# Altium PCB Arduino-DUE-V03.PcbDoc (part 1 of 2)
Units mil, origin at the board's own origin, x right, y up, seen from the top; angles counter-clockwise.
Board outline 4000 x 2100 mil, 2 copper layers (Top, Bottom), stack 65.748 mil thick; 128 components, 163 nets, 632 pads, 387 vias.
Unrouted connection lines stored in the file: 4.
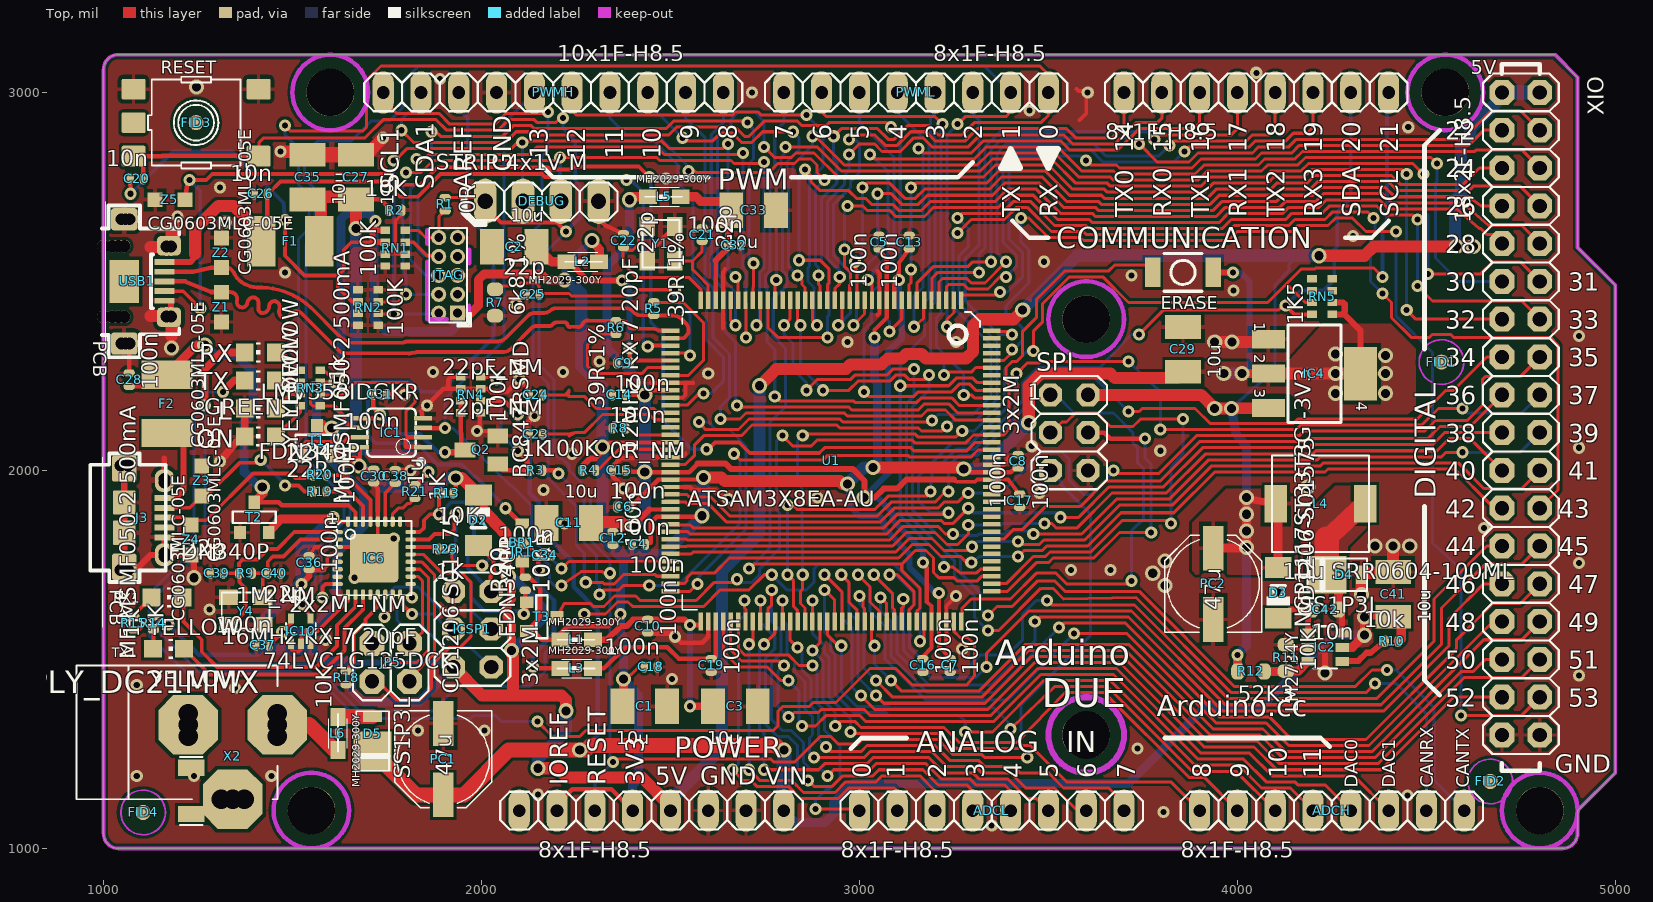
[diagram p0: Top view]
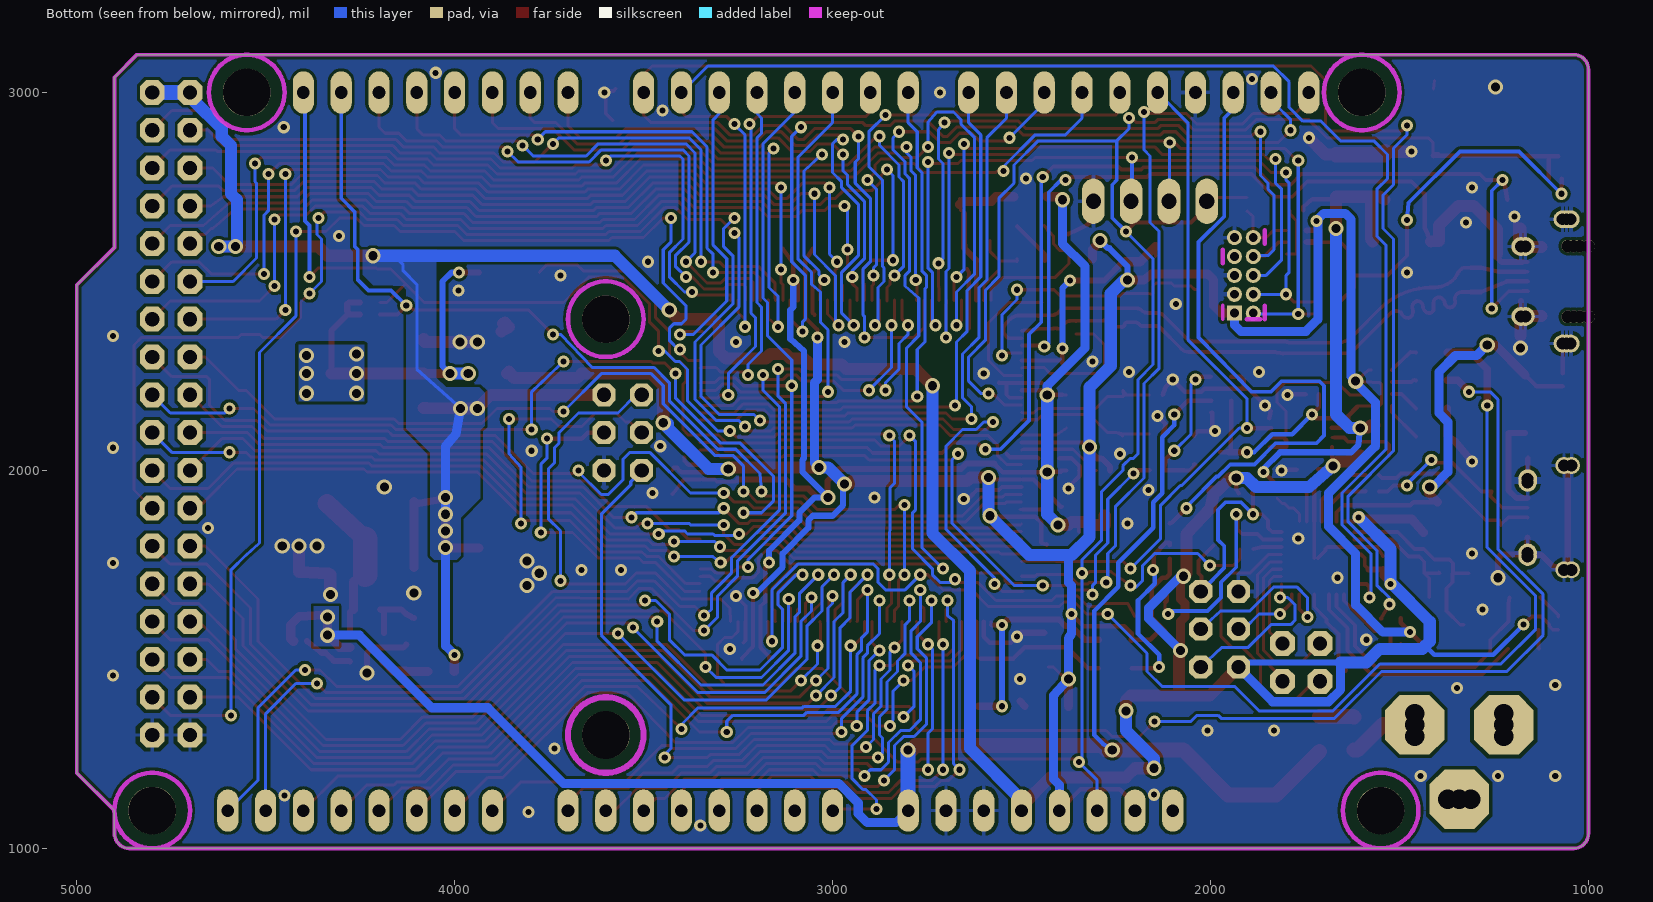
[diagram p1: Bottom view, seen from below]

## Layer stack, top to bottom
Top Solder: solder mask 0.4, Solder Resist, Dk 3.5
Top: signal copper 1.378
Dielectric 1: core 62.9921, FR-4, Dk 4.8
Bottom: signal copper 1.378
Bottom Solder: solder mask 0.4, Solder Resist, Dk 3.5

## Board outline
1039.37,3100 4840,3100 4900,3040 4900,2590 5000,2490 5000,1200 4900,1100 4900,1039.37 cw(c4860.63,1039.37) 4860.63,1000 1039.37,1000 cw(c1039.37,1039.37) 1000,1039.37 1000,3060.63 cw(c1039.37,3060.63)

## Design rules (kind name [scope] priority, off if disabled: settings)
Clearance [All] p1: gap=8 except(0: SMDPad-SMDPad SMDPad-THPad SMDPad-Via)
Clearance "Clearance (Same Net)" [All] p2: gap=0 except(6: SMDPad-SMDPad SMDPad-THPad SMDPad-Via)
HoleSize HoleSize_1 [All] p1: absolutevalues=TRUE maxlimit=100000 minlimit=16 maxpercent=80.000 minpercent=20.000
HoleSize [All] p2: absolutevalues=TRUE maxlimit=100 minlimit=1 maxpercent=80.000 minpercent=20.000
HoleToHoleClearance mdViaViaSameLayer [All] p1: gap=8 allowstackedmicrovias=TRUE
HoleToHoleClearance [All] p2: gap=10 allowstackedmicrovias=TRUE
PasteMaskExpansion mlMinCreamFrame [All] p1: expansion=-25
PasteMaskExpansion [All] p2: expansion=0
PolygonConnect ThermalVias [IsVia] p1: connectstyle=Direct reliefconductorwidth=10 reliefentries=4 polygonreliefangle="90 Angle" airgapwidth=10
PolygonConnect [All] p2: connectstyle=Relief reliefconductorwidth=10 reliefentries=4 polygonreliefangle="90 Angle" airgapwidth=10
RoutingVias [All] p1: holewidth=28 width=50 viastyle="Through Hole" minholewidth=28 minwidth=50 maxholewidth=28 maxwidth=50
SilkToSilkClearance [All] p1 off: silktosilkclearance=10
SilkToSolderMaskClearance [IsPad] p1 off: minsilkscreentomaskgap=10 clearancetoexposedcopper=TRUE
SolderMaskExpansion mlMinStopFrame [All] p1: expansion=2
SolderMaskExpansion [All] p2: expansion=4
Width Width_1 [All] p1: maxlimit=100000 minlimit=8 preferedwidth=10
Width [All] p2: maxlimit=10 minlimit=10 preferedwidth=10
25 further rules are at their usual default settings.

## Components (designator, comment, footprint, x,y, rotation, side; value= is the part's Value field where it differs from the comment)
ADCH "8x1F-H8.5" 1X08 4250,1100 r0 top
ADCL "8x1F-H8.5" 1X08 3350,1100 r0 top
BR1 "NM" J0402 2108,1834 r270 top
C1 "10u" SMC_B 2432,1376 r0 top
C2 "10u" SMC_B 2087,2592 r180 top
C3 "10u" SMC_B 2672,1376 r0 top
C4 "100n" C0402 2416,1804 r0 top
C5 "100n" C0402 3052,2604 r270 top
C6 "100n" C0402 2376,1904 r0 top
C7 "100n" C0402 3240,1484 r90 top
C8 "100n" C0402 3420,2024 r270 top
C9 "100n" C0402 2376,2284 r0 top
C10 "100n" C0402 2440,1588 r90 top
C11 "10u" SMC_B 2231,1861 r180 top
C12 "100n" C0402 2348,1820 r90 top
C13 "100n" C0402 3132,2604 r270 top
C14 "100n" C0402 2364,2200 r0 top
C15 "100n" C0402 2364,2000 r0 top
C16 "100n" C0402 3168,1484 r90 top
C17 "100n" C0402 3424,1920 r90 top
C18 "100n" C0402 2448,1480 r180 top
C19 "100n" C0402 2608,1484 r90 top
C20 "10n" C0402 1088,2772 r180 top
C21 "22p" C0402 2584,2624 r90 top
C22 "22p" C0402 2376,2608 r90 top
C23 "22pF_NM" C0402 2144,2096 r180 top
C24 "22pF_NM" C0402 2144,2200 r180 top
C25 "22p" C0402 2136,2466 r180 top
C26 "10n" C0402 1416,2732 r180 top
C27 "10u" SMC_B 1668,2776 r90 top
C28 "100n" C0402 1068,2240 r90 top
C29 "10u" SMC_B 3856,2320 r90 top
C30 "100n" C0402 1715,1985 r90 top
C31 "100n" C0402 1731,2201 r180 top
C32 "100n" C0402 2668,2596 r180 top
C33 "10u" SMC_B 2720,2688 r0 top
C34 "100n" C0402 2168,1776 r180 top
C35 "10u" SMC_B 1540,2776 r90 top
C36 "100n" C0402 1544,1756 r90 top
C37 "100n" C0402 1420.82,1537.54 r180 top
C38 "1u" C0402 1772,1984 r90 top
C39 "22p" C0402 1300,1728 r180 top
C40 "22p" C0402 1452,1728 r0 top
C41 "10u" SMC_B 4412,1672 r90 top
C42 "10n" C0603-ROUND 4232,1632 r0 top
COMMUNICATION "8x1F-H8.5" 1X08 4050,3000 r0 top
D2 "CD1206-S01575" MINIMELF 1992,1868 r270 top
D3 "CD1206-S01575" MINIMELF 4108,1676 r90 top
D4 "SS1P3L" DO220AAL 4264,1724 r0 top
D5 "SS1P3L" DO220AAL 1712,1284 r90 top
DEBUG "STRIP 4x1V M" 1X04 2160,2712 r180 top
ERASE "" SMD_157SW 3856,2524 r180 top
F1 "MF-MSMF050-2 500mA" L1812 1494,2606 r180 top
F2 "MF-MSMF050-2 500mA" L1812 1168,2176 r270 top
FID1 "" FIDUCIA-MOUNT 4540,2286.63 r0 top
FID2 "" FIDUCIA-MOUNT 4669,1177 r0 top
FID3 "" FIDUCIA-MOUNT 1245,2920 r0 top
FID4 "" FIDUCIA-MOUNT 1105,1095 r0 top
IC1 "LMV358IDGKR" MSOP08 1762,2100 r90 top
IC2 "LM2734Y" SOT23-6 4232,1532 r270 top
IC4 "NCP1117ST33T3G -3V3" SOT223 4204,2256 r270 top
IC6 "" MLF32 1716,1768 r0 top
IC10 "74LVC1G125DCK" SC70-5 1522.17,1574.8 r0 top
ICSP1 "3x2M" 2X03 1975.94,1580 r90 top
J3 "" CON2_USB_MICRO_B_AT 1055,1875 r270 top
JP5 "2x2M - NM" 2X02 1760.06,1492 r180 top
JR1 "0R" R0402#1 2108,1784 r90 top
JTAG "" PINHEAD_2X05_127 1912,2516 r180 top
L "YELLOW" CHIP-LED0805 1415,2164 r90 top
L1 "MH2029-300Y" 0805 2252,1552 r0 top
L2 "MH2029-300Y" 0805 2268,2552 r180 top
L3 "MH2029-300Y" 0805 2252,1476 r0 top
L4 "10u SRR0604-100ML" SRR0604 4220,1912 r0 top
L5 "MH2029-300Y" 0805 2484,2724 r0 top
L6 "MH2029-300Y" 0805 1620,1304 r270 top
ON "GREEN" CHIP-LED0805 1415,2090 r90 top
PC1 "47u" PANASONIC_D 1899,1236 r270 top
PC2 "47u" PANASONIC_D 3936,1700 r90 top
POWER "8x1F-H8.5" 1X08 2450,1100 r0 top
PWMH "10x1F-H8.5" 1X10 2190,3000 r180 top
PWML "8x1F-H8.5" 1X08 3150,3000 r180 top
Q2 "BC847BSMD" SOT23 2000,2054 r90 top
R1 "0R" R0402#1 1904,2704 r90 top
R2 "10K" R0402#1 1772,2688 r180 top
R3 "1K" R0402#1 2144,2000 r180 top
R4 "100K" R0402#1 2284,2000 r180 top
R5 "39R 1%" R0402#1 2456,2428 r90 top
R6 "39R 1%" R0402#1 2356,2378 r270 top
R7 "6k8 1%" R0603-ROUND 2036,2444 r90 top
R8 "0R_NM" R0402#1 2364,2112 r0 top
R9 "1M_NM" R0402#1 1376,1728 r0 top
R10 "10k" R0402#1 4408,1548 r180 top
R11 "10K" R0603-ROUND 4128,1504 r90 top
R12 "52K3" R0603-ROUND 4036,1468 r0 top
R13 "10K" R0402#1 1908,1940 r0 top
R14 "1K" R0402#1 1132,1596 r270 top
R15 "1K" R0402#1 1080,1596 r90 top
R18 "10K" R0402#1 1642.11,1451.06 r270 top
R19 "22R" R0402#1 1572,1944 r180 top
R20 "22R" R0402#1 1572,1988 r180 top
R21 "1K" R0402#1 1824,1944 r90 top
R23 "1K" R0402#1 1904,1792 r0 top
R99 "10K" R0402#2 2116,1700 r90 top
RESET "TS42" TS42 1245,2920 r0 top
RN1 "100K" CAT16 1772,2588 r90 top
RN2 "100K" CAT16 1700,2431 r270 top
RN3 "1k" CAY16 1547,2218 r270 top
RN4 "100K" CAT16 1972,2200 r270 top
RN5 "1K5" CAT16 4224,2460 r90 top
RX "YELLOW" CHIP-LED0805 1415,2312 r90 top
RX1 "YELLOW" CHIP-LED0805 1168,1664 r270 top
SPI "3x2M" 2X03 3555,2100 r270 top
T1 "FDN340P" SOT-23 1566,2079 r180 top
T2 "FDN340P" SOT-23 1400,1876 r180 top
T3 "FDN340P" SOT-23 2160,1612 r90 top
TX "YELLOW" CHIP-LED0805 1415,2238 r90 top
TX1 "YELLOW" CHIP-LED0805 1172,1528 r270 top
U1 "ATSAM3X8EA-AU" LQFP144 2925,2025 r180 top
USB1 "" MCR-AB1-S-RA-SMT 1055,2500 r270 top
X2 "POWERSUPPLY_DC21MMX" POWERSUPPLY_DC-21MM 1210,1330 r90 top
XIO "18x2F-H8.5" 2X18 4750,2150 r270 top
Y1 "12MHz KX-7 20pF" CRYSTAL-3.2-2.5 2475,2600 r270 top
Y4 "16MHz KX-7 20pF" CRYSTAL-3.2-2.5 1376,1628 r0 top
Z1 "CG0603MLC-05E" CT/CN0603 1312,2432 r270 top
Z2 "CG0603MLC-05E" CT/CN0603 1312,2576 r90 top
Z3 "CG0603MLC-05E" CT/CN0603 1260,1972 r270 top
Z4 "CG0603MLC-05E" CT/CN0603 1232,1816 r90 top
Z5 "CG0603MLC-05E" CT/CN0603 1176,2716 r0 top

## Footprints (in the part's own frame and the unit in brackets; to place one, negate y for a bottom-side part, rotate by r counter-clockwise, add the part's x,y. Pads: shape width x height; smd on the part's side, far side on the other; paste and mask are expansions set on the pad)
1X04 [mil] "1X04"
  oval 60x120 hole 40: 1(-150,0) 2(-50,0) 3(50,0) 4(150,0)
  silkscreen extent -200,-50 200,50
1X08 [mil] "1X08"
  oval 56x112 hole 33.46: 1(-350,0) 2(-250,0) 3(-150,0) 4(-50,0) 5(50,0) 6(150,0) 7(250,0) 8(350,0)
  silkscreen extent -400,-50 400,50
1X10 [mil] "1X10"
  oval 56x112 hole 33.46: 1(-450,0) 2(-350,0) 3(-250,0) 4(-150,0) 5(-50,0) 6(50,0) 7(150,0) 8(250,0) 9(350,0) 10(450,0)
  silkscreen extent -500,-50 500,50
2X02 [mil] "2X02"
  oct 66x66 hole 37.4: 1(-50,-50) 2(-50,50) 3(50,-50) 4(50,50)
  silkscreen extent -100,-100 100,100
2X03 [mil] "2X03"
  oct 61.02x61.02 hole 37.4: 1(-100,-50) 2(-100,50) 3(0,-50) 4(0,50) 5(100,-50) 6(100,50)
  silkscreen extent -150,-100 150,100
2X18 [mil] "2X18"
  oct 66x66 hole 37.4: 1(-850,-50) 2(-850,50) 3(-750,-50) 4(-750,50) 5(-650,-50) 6(-650,50) 7(-550,-50) 8(-550,50) 9(-450,-50) 10(-450,50) 11(-350,-50) 12(-350,50) 13(-250,-50) 14(-250,50) 15(-150,-50) 16(-150,50) 17(-50,-50) 18(-50,50) 19(50,-50) 20(50,50) 21(150,-50) 22(150,50) 23(250,-50) 24(250,50) 25(350,-50) 26(350,50) 27(450,-50) 28(450,50) 29(550,-50) 30(550,50) 31(650,-50) 32(650,50) 33(750,-50) 34(750,50) 35(850,-50) 36(850,50)
  silkscreen extent -900,-100 900,100
0805 [mm] "0805"
  rect 1.2x1 smd: 1(-1.1,0) 2(1.1,0)
  silkscreen extent -1.3,-0.63 1.2,0.63
C0402 [mil] "C0402"
  rrect90% 20x30 smd: 1(-17.5,0) 2(17.5,0)
C0603-ROUND [mil] "C0603-ROUND"
  rrect80% 35.37x43.31 smd: 1(-35,0) 2(35,0)
CAT16 [mm] "CAT16"
  rect 0.5x0.65 smd: 1(-1.2,-0.675) 2(-0.4,-0.675) 3(0.4,-0.675) 4(1.2,-0.675) 5(1.2,0.675) 6(0.4,0.675) 7(-0.4,0.675) 8(-1.2,0.675)
CAY16 [mm] "CAY16"
  rect 0.5x0.65 smd: 1(-1.2,-0.675) 2(-0.4,-0.675) 3(0.4,-0.675) 4(1.2,-0.675) 5(1.2,0.675) 6(0.4,0.675) 7(-0.4,0.675) 8(-1.2,0.675)
CHIP-LED0805 [mil] "CHIP-LED0805"
  rect 47.24x47.24 smd: A(0,-41.34) C(0,41.34)
  silkscreen extent -27,0 27,12
CON2_USB_MICRO_B_AT [mil] "CON2_USB_MICRO_B_AT"
  rrect10% 16x53 smd: P1(-52,106) P2(-26,106) P3(0,106) P4(26,106) P5(52,106)
  round 50 hole 31.5: P$1(-103,106)
  round 49 hole 31.5: P$2(-93,106) P$7(93,106) P$8(103,106)
  round 45 hole 31.5: P$3(-138,-10) P$4(-138,10) P$5(138,10) P$6(138,-10)
  rrect20% 70x65 smd: S1(-130,0) S2(130,0)
  rrect80% 60x50 smd: S3(-98,106) S4(98,106)
  rrect10% 64x60 smd: S5(-40,0) S6(40,0)
  silkscreen extent -170,-90 290,110
CRYSTAL-3.2-2.5 [mil] "CRYSTAL-3.2-2.5"
  rect 51.18x41.34 smd: 1(-45.28,-36.42) 2(45.28,-36.42) 3(45.28,36.42) 4(-45.28,36.42)
  silkscreen extent -63,-49 63,49
CT/CN0603 [mm] "CT/CN0603"
  rect 1x1 smd: 1(-1,0) 2(1,0)
DO220AAL [mil] "DO220AAL"
  rect 105x100 smd: P$1(-27.56,0)
  rect 30x50 smd: P$2(64.96,0)
  silkscreen extent -79,-43 79,43
FIDUCIA-MOUNT [mil] "FIDUCIA-MOUNT"
  rrect100% 40x40 smd: P$1(0,0)
  Top keep-out circle w5: c0,0 r59.06
J0402 [mm] "J0402"
  rect 0.7x0.9 smd: 1(-0.65,0) 2(0.65,0) 3(1.95,0)
L1812 [mil] "L1812"
  rect 74.8x133.86 smd: 1(-76.77,0) 2(76.77,0)
LQFP144 [mil] "LQFP144"
  rect 11.81x47.24 smd: 1(-344.49,-425.2) 2(-324.8,-425.2) 3(-305.12,-425.2) 4(-285.43,-425.2) 5(-265.75,-425.2) 6(-246.06,-425.2) 7(-226.38,-425.2) 8(-206.69,-425.2) 9(-187.01,-425.2) 10(-167.32,-425.2) 11(-147.64,-425.2) 12(-127.95,-425.2) 13(-108.27,-425.2) 14(-88.58,-425.2) 15(-68.9,-425.2) 16(-49.21,-425.2) 17(-29.53,-425.2) 18(-9.84,-425.2) 19(9.84,-425.2) 20(29.53,-425.2) 21(49.21,-425.2) 22(68.9,-425.2) 23(88.58,-425.2) 24(108.27,-425.2) 25(127.95,-425.2) 26(147.64,-425.2) 27(167.32,-425.2) 28(187.01,-425.2) 29(206.69,-425.2) 30(226.38,-425.2) 31(246.06,-425.2) 32(265.75,-425.2) 33(285.43,-425.2) 34(305.12,-425.2) 35(324.8,-425.2) 36(344.49,-425.2) 73(344.49,425.2) 74(324.8,425.2) 75(305.12,425.2) 76(285.43,425.2) 77(265.75,425.2) 78(246.06,425.2) 79(226.38,425.2) 80(206.69,425.2) 81(187.01,425.2) 82(167.32,425.2) 83(147.64,425.2) 84(127.95,425.2) 85(108.27,425.2) 86(88.58,425.2) 87(68.9,425.2) 88(49.21,425.2) 89(29.53,425.2) 90(9.84,425.2) 91(-9.84,425.2) 92(-29.53,425.2) 93(-49.21,425.2) 94(-68.9,425.2) 95(-88.58,425.2) 96(-108.27,425.2) 97(-127.95,425.2) 98(-147.64,425.2) 99(-167.32,425.2) 100(-187.01,425.2) 101(-206.69,425.2) 102(-226.38,425.2) 103(-246.06,425.2) 104(-265.75,425.2) 105(-285.43,425.2) 106(-305.12,425.2) 107(-324.8,425.2) 108(-344.49,425.2)
  rect 47.24x11.81 smd: 37(425.2,-344.49) 38(425.2,-324.8) 39(425.2,-305.12) 40(425.2,-285.43) 41(425.2,-265.75) 42(425.2,-246.06) 43(425.2,-226.38) 44(425.2,-206.69) 45(425.2,-187.01) 46(425.2,-167.32) 47(425.2,-147.64) 48(425.2,-127.95) 49(425.2,-108.27) 50(425.2,-88.58) 51(425.2,-68.9) 52(425.2,-49.21) 53(425.2,-29.53) 54(425.2,-9.84) 55(425.2,9.84) 56(425.2,29.53) 57(425.2,49.21) 58(425.2,68.9) 59(425.2,88.58) 60(425.2,108.27) 61(425.2,127.95) 62(425.2,147.64) 63(425.2,167.32) 64(425.2,187.01) 65(425.2,206.69) 66(425.2,226.38) 67(425.2,246.06) 68(425.2,265.75) 69(425.2,285.43) 70(425.2,305.12) 71(425.2,324.8) 72(425.2,344.49) 109(-425.2,344.49) 110(-425.2,324.8) 111(-425.2,305.12) 112(-425.2,285.43) 113(-425.2,265.75) 114(-425.2,246.06) 115(-425.2,226.38) 116(-425.2,206.69) 117(-425.2,187.01) 118(-425.2,167.32) 119(-425.2,147.64) 120(-425.2,127.95) 121(-425.2,108.27) 122(-425.2,88.58) 123(-425.2,68.9) 124(-425.2,49.21) 125(-425.2,29.53) 126(-425.2,9.84) 127(-425.2,-9.84) 128(-425.2,-29.53) 129(-425.2,-49.21) 130(-425.2,-68.9) 131(-425.2,-88.58) 132(-425.2,-108.27) 133(-425.2,-127.95) 134(-425.2,-147.64) 135(-425.2,-167.32) 136(-425.2,-187.01) 137(-425.2,-206.69) 138(-425.2,-226.38) 139(-425.2,-246.06) 140(-425.2,-265.75) 141(-425.2,-285.43) 142(-425.2,-305.12) 143(-425.2,-324.8) 144(-425.2,-344.49)
  silkscreen extent -394,-394 394,394
MCR-AB1-S-RA-SMT [mm] "MCR-AB1-S-RA-SMT"
  round 0.85 hole 0.85: 1(-2.375,-0.8) 1(-2.375,-0.4) 1(-2.375,0) 1(-2.375,-1.4) 1(2.375,-0.8) 1(2.375,-0.4) 1(2.375,0) 1(2.375,-1.4)
  rrect10% 0.4x1.35 smd: 1(-1.3,2.7) 2(-0.65,2.7) 3(0,2.7) 4(0.65,2.7) 5(1.3,2.7)
  round 1.2 hole 0.8: P$1(-4.175,0.356) P$3(-4.175,0.076) P$4(-4.175,-0.203) P$5(4.175,0.356) P$6(4.175,0.076) P$7(4.175,-0.203)
  rect 2.9x2 smd: P$2(0,0)
  round 1.27 hole 0.8: P$8(-2.35,3.15) P$9(-2.35,2.85) P$10(2.35,3.15) P$11(2.35,2.85)
  rrect40% 1.3x1.6 smd: S1(-2.4,3) S2(2.4,3)
  rrect30% 1.5x1.8 smd: S3(-4.175,0) S4(4.175,0)
  silkscreen extent -5.35,-1.5 5.35,3.7
MINIMELF [mil] "MINIMELF"
  rect 55.12x70.87 smd: A(66.93,0) C(-66.93,0)
  silkscreen extent -34,-31 20,31
MLF32 [mil] "MLF32"
  rrect80% 27.56x11.02 smd: 1(-96.46,68.9) 2(-96.46,49.21) 3(-96.46,29.53) 4(-96.46,9.84) 5(-96.46,-9.84) 6(-96.46,-29.53) 7(-96.46,-49.21) 8(-96.46,-68.9) 17(96.46,-68.9) 18(96.46,-49.21) 19(96.46,-29.53) 20(96.46,-9.84) 21(96.46,9.84) 22(96.46,29.53) 23(96.46,49.21) 24(96.46,68.9)
  rrect80% 11.02x27.56 smd: 9(-68.9,-96.46) 10(-49.21,-96.46) 11(-29.53,-96.46) 12(-9.84,-96.46) 13(9.84,-96.46) 14(29.53,-96.46) 15(49.21,-96.46) 16(68.9,-96.46) 25(68.9,96.46) 26(49.21,96.46) 27(29.53,96.46) 28(9.84,96.46) 29(-9.84,96.46) 30(-29.53,96.46) 31(-49.21,96.46) 32(-68.9,96.46)
  rrect15% 128.11x128.11 smd: 33(0,0)
  silkscreen extent -98,-98 98,98
MSOP08 [mil] "MSOP08"
  rect 11.81x47.24 smd: 1(-38.43,-83.19) 2(-12.83,-83.19) 3(12.76,-83.19) 4(38.35,-83.19) 5(38.35,83.15) 6(12.76,83.15) 7(-12.83,83.15) 8(-38.43,83.15)
  silkscreen extent -64,-64 64,64
PANASONIC_D [mm] "PANASONIC_D"
  rect 3x1.4 smd: +(2.4,0) -(-2.4,0)
  silkscreen extent -3.25,-3.25 3.25,3.25
PINHEAD_2X05_127 [mil] "PINHEAD_2X05_127"
  rect 40x40 hole 23.62: 1(-25,100)
  round 40 hole 23.62: 2(25,100) 3(-25,50) 4(25,50) 5(-25,0) 6(25,0) 7(-25,-50) 8(25,-50) 9(-25,-100) 10(25,-100)
  silkscreen extent -60,-125 50,135
POWERSUPPLY_DC-21MM [mil] "POWERSUPPLY_DC-21MM"
  oct 157.48x157.48 hole 51.18: 1(-200,-132) 2(-3,-250) 3(-3,-14)
  round 76.77 hole 51.18: 4(-200,-162) 5(-200,-102) 6(-33,-14) 7(27,-14) 8(-33,-250) 9(27,-250)
  silkscreen extent -200,-250 154,281
R0402#1 [mil] "R0402"
  rrect90% 20x30 smd: 1(-17.5,0) 2(17.5,0)
R0402#2 [mil] "R0402"
  rrect90% 20x30 smd: 1(-17.5,0) 2(17.5,0)
  rect 43.31x70.87 smd: P$1(-609.02,884) P$2(-486.98,884)
  silkscreen extent -638,854 -458,914
R0603-ROUND [mil] "R0603-ROUND"
  rrect80% 35.37x43.31 smd: 1(-35,0) 2(35,0)
SC70-5 [mm] "SC70-5"
  rect 0.4x0.7 smd: 1(-0.65,-0.85) 2(0,-0.85) 3(0.65,-0.85) 4(0.65,0.85) 5(-0.65,0.85)
  silkscreen extent -1,-0.55 1,0.55
SMC_B [mil] "SMC_B"
  rect 62.99x94.49 smd: +(-59.06,0) -(59.06,0)
SMD_157SW [mil] "SMD_157SW"
  rect 40x78 smd: 1(-80,0) 2(80,0)
  silkscreen extent -50,-50 50,50
SOT23 [mm] "SOT23"
  rect 1x1.4 smd: 1(-0.95,-1.1) 2(0.95,-1.1) 3(0,1.1)
SOT23-6 [mil] "SOT23-6"
  rect 23.62x35.43 smd: 1(-37.4,-45.28) 2(0,-45.28) 3(37.4,-45.28) 4(37.4,45.28) 5(0,45.28) 6(-37.4,45.28)
  silkscreen extent -56,-31 56,31
SOT223 [mil] "SOT223"
  rect 48x88 smd: 1(-91,-122) 2(0,-122) 3(91,-122)
  rect 141.73x86.61 smd: 4(0,122.01)
  silkscreen extent -129,-70 129,70
SOT-23 [mil] "SOT-23"
  rect 31x35 smd: 1(1,-40) 2(-37,40) 3(39,40)
  silkscreen extent -56,-15 58,15
SRR0604 [mm] "SRR0604"
  rect 1.5x2.5 smd: P$1(3,0) P$2(-3,0)
  silkscreen extent -3.25,-3.25 3.25,3.25
TS42 [mil] "TS42"
  rrect15% 62.99x55.12 smd: 1(-165.35,88.58) 2(165.35,88.58) 3(-165.35,-88.58) 4(165.35,-88.58) 5(-165.35,0)
  silkscreen extent -127,-122 117,122

## Part data
ADCH ADCL COMMUNICATION POWER PWML: library part 1X08
BR1: library part J0402
C1 C2 C3 C11 C27 C29 C33 C35 C41: library part SMC_B
C4 C5 C6 C7 C8 C9 C10 C12 C13 C14 C15 C16 C17 C18 C19 C20 C21 C22 C23 C24 C25 C26 C28 C30 C31 C32 C34 C36 C37 C38 C39 C40: library part C0402
C42: library part C0603-ROUND
D2 D3: library part MINIMELF
D4 D5: library part DO220AAL
DEBUG: library part 1X04
ERASE: library part SMD_157SW
F1 F2: library part L1812
FID1 FID2 FID3 FID4: library part FIDUCIA-MOUNT
IC1: library part MSOP08
IC2: library part SOT23-6
IC4: library part SOT223
IC6: library part MLF32
IC10: library part SC70-5
ICSP1 SPI: library part 2X03
J3: library part CON2_USB_MICRO_B_AT
JP5: library part 2X02
JR1 R1 R2 R3 R4 R5 R6 R8 R9 R10 R13 R14 R15 R18 R19 R20 R21 R23 R99: library part R0402
JTAG: library part PINHEAD_2X05_127
L ON RX RX1 TX TX1: library part CHIP-LED0805
L1 L2 L3 L5 L6: library part 0805
L4: library part SRR0604
PC1 PC2: library part PANASONIC_D
PWMH: library part 1X10
Q2: library part SOT23
R7 R11 R12: library part R0603-ROUND
RN1 RN2 RN4 RN5: library part CAT16
RN3: library part CAY16
T1 T2 T3: library part SOT-23
U1: library part LQFP144
USB1: library part MCR-AB1-S-RA-SMT
X2: library part POWERSUPPLY_DC-21MM
XIO: library part 2X18
Y1 Y4: library part CRYSTAL-3.2-2.5
Z1 Z2 Z3 Z4 Z5: library part CT/CN0603

## Free pads (board coordinates)
  round 125.98 hole 125.98: 1(1550,1100) 1(1600,3000) 1(3600,1300) 1(3600,2400) 1(4550,3000) 1(4800,1100)

## Via types
v1: diameter 32/32 (per signal layer), hole 16, Top to Bottom, 323 vias
v2: diameter 40/40 (per signal layer), hole 24, Top to Bottom, 64 vias

## Nets (pads, with @x,y where several pads share a name; then routed paths per layer and width w, separated by ;. In a path a pad name is that pad's centre, name@x,y a point inside that pad or via, vN(x,y) a via of type N, cw(c..) or ccw(c..) an arc to the next point about the centre after c; other vN are vias at no path point)
5-GND: RESET.5
8PB4: IC6.18 JP5.1 | length 217.3
  Top w8: JP5.1@1810.06,1542 1844,1572 1844,1708 1833.21,1718.79 IC6.18@1812.46,1718.79
8PB5: IC6.19 JP5.3 | length 432.8
  Top w8: JP5.3@1710.06,1542 1760.06,1492 1828,1492 1860,1524 1860,1716 1837.53,1738.47 IC6.19@1812.46,1738.47
8PB6: IC6.20 JP5.2 | length 387
  Top w8: JP5.2@1810.06,1442 1810.06,1450.06 1876,1516 1876,1724 1841.84,1758.16 IC6.20@1812.46,1758.16
8PB7: IC6.21 JP5.4 | length 721.5
  Top w8: JP5.4@1710.06,1442 1726,1442 1776,1392 1836,1392 1868,1424 1868,1484 1916,1532 1944,1532 1972,1560 1972,1704.06 1948.06,1728 1896,1728 1846.16,1777.84 IC6.21@1812.46,1777.84
16U2-TX: IC6.9 IC10.1 IC10.2 | length 262.9
  Top w10: IC10.1@1496.58,1541.34 1496.58,1527.42 1504,1520 1516,1520 1522.17,1526.17 IC10.2@1522.17,1541.34 1523.75,1542.91 1523.75,1566.93 1531.62,1574.8 1566.93,1574.8 1647.1,1654.98 IC6.9@1647.1,1671.54
+3V3: BR1.3 C1.+ C4.2 C5.2 C6.2 C7.2 C8.2 C18.2 C20.2 C29.+ C37.1 ERASE.1 IC1.6 IC4.2 IC4.4 IC10.5 JR1.1 JTAG.1 L1.1 L2.1 POWER.2 POWER.4 R4.2 R99.2 RN1.5 RN1.6 RN2.2 RN2.3 RN3.5 RN3.7 RN3.8 RN5.1 RN5.2 T3.2 U1.11 U1.52 U1.57 U1.62 U1.105 U1.125 | length 11598.3
  Top w8: RN3.8@1573.57,2265.24 1582.76,2265.24 v2(1616,2236) 1613.75,2233.75 RN3.7@1573.57,2233.75 1571.83,2232 1552,2232 1548,2228 1548,2176 1553.24,2170.76 RN3.5@1573.57,2170.76 1610.76,2170.76 1612,2168 ; RN2.2@1672.68,2446 RN2.2@1673.43,2446.75 ; L2.1@2311.31,2552 2313.31,2553.31 L2.1@2312,2560 ; C1.+@2372.94,1376 C1.+@2376,1376 ; v2(2376,1448) 2396,1460 2416,1480 C18.2@2430.5,1480 ; U1.57@2496,1976 U1.57@2499.8,1975.79 U1.57@2503.5,1975.5 ; U1.11@3072.5,2452 U1.11@3072.64,2450.2 ; C8.2@3420,2006.5 C8.2@3424,2000
  Top w10: C37.1@1438.32,1537.54 C37.1@1438.32,1538.32 ; v1(1480,2662) 1480,2568 1532,2516 1620,2516 ; RN2.2@1672.68,2446 1672,2446 1672,2422 1670.84,2415.73 1670.75,2415.25 RN2.3@1673.43,2415.25 ; RN2.2@1673.43,2446.75 1657.25,2446.75 1620,2484 1620,2516 ; 1712,2603.75 1655.75,2603.75 1636,2584 1636,2532 1620,2516 ; RN5.2@4250.57,2444.25 4259.75,2444.25 RN5.2@4260,2444
  Top w11: v2@2327,2066 2339.21,2074.21 U1.52@2499.8,2074.21 ; 2467.5,1975.5 U1.57@2496,1976 ; U1.57@2503.5,1975.5 2579.5,1975.5 2580,1976 v2(2587.5,1981.5) ; v1(3040,2352) 3040,2372 3072.5,2404.5 3072.5,2449 3072.64,2448.64 U1.11@3072.64,2450.2 ; U1.11@3072.5,2452 3072.5,2555 ; v1(3210,1676) 3210.43,1678.43 U1.105@3210.43,1599.8 3210.43,1533.57 3240,1504 C7.2@3240,1501.5
  Top w12: C20.2@1070.5,2772 v1(1072,2732) ; C37.1@1438.32,1538.32 v1(1472,1572) 1496.58,1596.58 IC10.5@1496.58,1608.26 ; 1612,2168 1636,2144 1636,2132 1655.24,2112.76 IC1.6@1678.85,2112.76 ; JR1.1@2108,1766.5 BR1.3@2108,1757.23 2108,1725.5 R99.2@2116,1717.5 2117.5,1716 2128,1716 2156,1688 2156,1611 T3.2@2120,1575 2129,1583 2160,1552 L1.1@2208.69,1552 2208.69,1568.69 2228,1588 2336,1588 v1(2368,1620) ; POWER.2@2200,1100 2200,1116 2240,1156 2344,1156 POWER.4@2400,1100 ; C6.2@2393.5,1904 2396,1904 2467.5,1975.5 ; C4.2@2433.5,1804 2448,1808 2448,1862 2463.36,1877.36 U1.62@2499.8,1877.36 2581.36,1877.36 v2(2584,1880) ; C5.2@3052,2586.5 3072.5,2555 ; v2(3276,2004) 3284.53,1995.47 U1.125@3350.2,1995.47 3400.53,1995.47 3411.56,2006.5 C8.2@3420,2006.5
  Top w16: v1(1720,2660) 1712,2636 ; RN1.6@1745.43,2603.75 1712,2603.75 1712,2636 ; RN1.5@1745.43,2635.24 1721.43,2636 1712,2636 ; L1.1@2206.28,1554.41 L1.1@2208.69,1552 ; R4.2@2266.5,2000 2266.5,2010.5 2288,2032 2300,2032 2320,2052 v2(2320,2062) v2@2327,2066 ; ERASE.1@3936,2524 v1(3988,2524) ; RN5.1@4250.57,2412.76 4276.76,2412.76 ; RN5.2@4250.57,2444 RN5.2@4250.57,2444.25 ; RN5.2@4250.83,2444 4260,2444 4280,2444 4284,2440 4284,2420 4276.76,2412.76 ; IC4.4@4326.01,2256 4326.01,2369.99 4283.24,2412.76 4276.76,2412.76
  Top w24: JTAG.1@1937,2416 1972,2416 1992,2436 1992,2504 2008,2520 2156,2520 2176,2504 v2(2220,2504) ; v2(2292,2608) 2312,2584 L2.1@2312,2560 ; C1.+@2376,1376 v2(2376,1448) ; v2(4012,2256) IC4.2@4082,2256
  Top w32: v2(2587.5,1981.5) 2634.5,1981.5 2644,1972 2948,1972 2956,1964 v2(2968,1964) ; v2(3036,2008) 3272,2008 v2(3276,2004) ; v2(3448,2126) 3448,2224 3480,2256 3664,2256 3676,2244 3843.06,2244 C29.+@3856,2260.94 C29.+@3860.94,2256 ; IC4.2@4082,2256 v2(4260,2256) IC4.4@4326.01,2256
  Bottom w10: v1(1072,2732) 1184,2844 1340,2844 1476,2708 v1(1480,2662)
  Bottom w16: v2@1616,2232 v2(1616,2236) ; v1@1716,2656 v1(1720,2660) ; v2(2220,2504) 2220,2540 2268,2588 2272,2588 v2(2292,2608) ; v2(2584,1880) v2@2587.5,1884.5 ; v2(2968,1964) 2972,1960 2972,1908 3000,1880 3052,1880 3064,1868 3064,1848 3132,1780 3132,1744 3200,1676 v1(3210,1676) ; v1(3988,2524) 4008,2524 4032,2500 4032,2276 v2(4012,2256)
  Bottom w24: v1(1472,1572) 1544,1572 1616,1644 1616,1780 1688,1852 1688,1940 1564,2064 1564,2180 v2@1616,2232 ; v2(1616,2236) 1628,2248 1628,2664 1644,2680 1700,2680 v1(1720,2660) ; v1@1716,2656 1716,2400 1748,2368 1920,2368 1937,2385 JTAG.1@1937,2416 ; 2368,1776 2376,1768 2376,1704 2368,1696 v1(2368,1620) 2368,1568 2376,1556 v2(2376,1448) 2416,1404 2416,1184 2400,1168 POWER.4@2400,1100 ; v2(3036,2008) 3048,2020 3048,2232 3040,2240 v1(3040,2352)
  Bottom w32: v2(2220,2504) 2228,2504 2264,2468 2264,2276 2320,2220 v2(2320,2062) 2320,1824 2368,1776 2480,1776 v2(2584,1880) ; v2@2587.5,1884.5 v2(2587.5,1981.5) ; v2(2968,1964) 3012,2008 v2(3036,2008) ; v2(3276,2004) 3328,2004 3436,2112 3436,2124 v2(3448,2126) ; v2(3964,2256) v2(4012,2256)
  other v2: 4260,2204 4392,2204 4392,2256 4392,2304 4260,2308
+5V: C30.2 C36.1 D2.C D3.A IC1.8 IC4.3 IC6.4 IC6.32 ICSP1.2 L4.P$2 PC2.+ POWER.5 R12.1 R13.2 R14.1 R15.1 SPI.2 T1.2 T2.2 XIO.1 XIO.2 | length 10625.7
  Top w10: R15.1@1080,1578.5 1094.5,1578.5 1104,1588 1104,1592 1125.5,1613.5 R14.1@1132,1613.5 1150.5,1613.5 v1(1172,1592) ; 1582.41,1738.41 1592,1748 1592,1768 1601.84,1777.84 IC6.4@1619.54,1777.84 ; v1(1608,1876) 1619.54,1864.46 IC6.32@1647.1,1864.46 ; v2(1676,2012) 1678.85,2014.85 IC1.8@1678.85,2061.57
  Top w12: v2(1676,2012) 1685.5,2002.5 C30.2@1715,2002.5 ; R13.2@1925.5,1940 1932,1950.5 v2(1932,1980)
  Top w16: v1(1524,1699.87) 1544.41,1720.28 C36.1@1544,1738.5 1582.41,1738.41 ; v1@1604,1872 v1(1608,1876) ; D2.C@1992,1934.93 1994.93,1944 D2.C@1996,1944
  Top w20: v2(4024,1884) 4024,1916 4032,1924 L4.P$2@4101.89,1912
  Top w24: T2.2@1437,1836 1468,1872 v1@1604,1872 ; v2@2064,1728 v2(2072,1720) 2080,1712 2080,1660 2068,1648 2068,1612 2080,1600 v2(2080,1524) ; PC2.+@3936,1794.49 4022.49,1794.49 v2(4024,1796) v2(4024,1840) v2(4024,1884) ; v1(4000,1512) R12.1@4001,1468 ; L4.P$2@4101.89,1912 4108,1917.89 D3.A@4108,1742.93
  Top w32: T1.2@1603,2039 1621,2039 1636,2024 1664,2024 v2(1676,2012) ; ICSP1.2@1925.94,1480 2001.94,1404 2084,1404 ; v2@1933.59,1982.41 v2(1932,1980) 1948,1980 1984,1944 D2.C@1994.93,1944 ; D2.C@1992,1934.93 2000,1900 2064,1832 v2@2064,1728 ; v2(2080,1524) 2080,1516 2084,1508 2084,1404 ; v2(2150,1212) 2200,1212 2224,1188 2424,1188 2500,1112 POWER.5@2500,1100 ; v2(2224,1364) 2224,1392 2212,1404 2084,1404 ; v2(2736,2224) 2780,2268 2964,2268 2976,2280 3058,2280 3076,2296 3112,2296 3124,2308 3164,2308 3176,2296 3282,2296 3300,2314 3300,2382 3318,2400 3408,2400 v2(3432,2424) ; SPI.2@3605,2200 3904,2200 v2(3940,2164) v2(3984,2164) ; v2(4216,2568) 4336,2568 4360,2592 v2(4580,2592) v2(4624,2592) ; v2(3984,2164) 3997,2164 IC4.3@4082,2165 4073,2165 v2(3984,2164)
  Bottom w8: v2(3984,2164) 4100,2268 4100,2492 4136,2528 4136,2544 4156,2564 4156,2568
  Bottom w12: v1(1172,1592) 1252,1512 1408,1512 1432,1536
  Bottom w16: v1@1520.06,1699.87 v1(1524,1699.87) ; 1656,1492 1912,1492 ICSP1.2@1925.94,1480
  Bottom w24: 1432,1536 1440,1528 ; 1656,1492 1656,1420 1688,1388 1836,1388 ICSP1.2@1928,1480 ; v2(2072,1720) 2080,1720 2164,1636 2164,1608 v2(2080,1524) ; v2(3984,2164) 3996,2096 4024,2064 v2(4024,1928) v2(4024,1884) ; v1(4000,1512) 4024,1536 v2(4024,1796)
  Bottom w32: 1432,1536 1420,1548 1420,1599.81 v1@1520.06,1699.87 ; 1440,1528 1552,1528 1588,1492 1656,1492 ; v1(1524,1699.87) 1524,1792 v1(1608,1876) ; v2(1676,2012) 1740,1956 1880,1956 1904,1980 v2(1932,1980) ; v2(2150,1212) 2150,1238 2224,1312 v2(2224,1364) ; POWER.5@2500,1100 2500,1128 2636,1264 2636,1734 2736,1834 v2(2736,2224) ; v2(3432,2424) 3576,2568 4156,2568 v2(4216,2568) ; v2(4580,2592) v2@4584,2592 ; v2(4624,2592) v2@4584,2592 ; XIO.1@4700,3000 4692,2980 4616,2904 4616,2884 4592,2860 4592,2732 4576,2716 4576,2600 v2@4584,2592
  Bottom w40: XIO.1@4700,3000 XIO.2@4800,3000
AD0: ADCL.1 U1.78 | length 847.2
  Top w8: U1.78@2678.94,1599.8 2680,1592 2680,1527.94 2695.94,1512 2812,1512 2840,1484 v1(2876,1484) ; v1(2884,1104) 3000,1104 ADCL.1@3000,1100
  Bottom w8: v1(2876,1484) 2888,1472 2888,1384 2908,1364 2908,1312 2948,1272 2948,1184 2920,1156 2912,1156 2884,1128 v1(2884,1104)
AD1: ADCL.2 U1.79 | length 1056.3
  Top w8: v1(2664,1208) 2692,1180 2712,1180 2728,1164 2812,1164 2844,1132 2944,1132 2972,1160 3092,1160 3100,1152 ADCL.2@3100,1100 ; v1(2696,1656) 2696,1636 2700,1632 2700,1599.8 U1.79@2698.62,1599.8
  Bottom w8: v1(2664,1208) 2680,1224 2680,1604 2696,1616 v1(2696,1656)
AD2: ADCL.3 U1.80 | length 1000.3
  Top w8: v1(2708,1208) 2736,1180 2820,1180 2852,1148 2936,1148 2964,1176 3044,1176 3060,1192 3160,1192 3200,1152 ADCL.3@3200,1100 ; v1(2708,1540) 2718,1548 U1.80@2718.31,1599.8
  Bottom w8: v1(2708,1208) v1(2708,1540)
AD3: ADCL.4 U1.81 | length 1156.7
  Top w8: U1.81@2737.99,1599.8 2737.99,1654.01 v1(2738,1656) ; v1(2864,1180) 2880,1164 2928,1164 2956,1192 3036,1192 3052,1208 3168,1208 3208,1168 3284,1168 3300,1152 ADCL.4@3300,1100
  Bottom w8: v1(2738,1656) 2738,1598 2776,1560 2776,1528 2752,1504 2752,1328 2784,1296 2812,1296 2836,1272 2836,1208 v1(2864,1180)
AD4: ADCL.5 U1.82 | length 1275.2
  Top w8: U1.82@2757.68,1599.8 2757.68,1633.68 2768,1644 v1(2768,1684) ; v1(2916,1192) 2932,1208 3028,1208 3044,1224 3176,1224 3216,1184 3292,1184 3308,1168 3384,1168 3400,1152 ADCL.5@3400,1100 ADCL.5@3400,1096
  Bottom w8: v1(2768,1684) 2768,1600 2792,1576 2792,1516 2768,1492 2768,1340 2796,1312 2820,1312 2852,1280 2852,1228 2872,1208 2900,1208 v1(2916,1192)
AD5: ADCL.6 U1.83 | length 1236.7
  Top w8: v1(2748,1208) 2892,1208 2908,1224 3020,1224 3036,1240 3184,1240 3224,1200 3300,1200 3316,1184 3392,1184 3444,1132 3468,1132 ADCL.6@3500,1100 ; v1(2748,1540) 2776,1568 2776,1592 U1.83@2777.36,1599.8
  Bottom w8: v1(2748,1208) 2748,1304 2736,1316 2736,1528 v1(2748,1540)
AD6: ADCL.7 U1.84 | length 1304.5
  Top w8: v1(2797,1656) 2797.05,1653.05 U1.84@2797.05,1599.8 ; v1(2880,1240) 3012,1240 3028,1256 3192,1256 3232,1216 3308,1216 3324,1200 3400,1200 3440,1160 3516,1160 3576,1100 ADCL.7@3600,1100
  Bottom w8: v1(2797,1656) 2797,1603 2808,1592 2808,1516 2828,1496 2828,1468 2856,1440 2856,1368 2876,1348 2876,1300 2868,1292 2868,1252 v1(2880,1240)
AD7: ADCL.8 U1.85 | length 1254.2
  Top w8: U1.85@2816.73,1599.8 2816,1592 2816,1551.89 2833.89,1534 v1(2836,1532) ; v1(2912,1268) 2924,1256 3004,1256 3020,1272 3200,1272 3240,1232 3316,1232 3332,1216 3408,1216 3424,1200 3500,1200 3540,1160 3660,1160 3700,1120 ADCL.8@3700,1100
  Bottom w8: v1(2836,1532) 2848,1520 2848,1472 2872,1448 2872,1376 2892,1356 2892,1288 v1(2912,1268)
AD8: ADCH.1 U1.88 | length 1462.4
  Top w8: U1.88@2875.79,1599.8 2875.79,1651.79 v1(2876,1656) ; v1(2976,1308) 2980,1304 3216,1304 3256,1264 3424,1264 3432,1272 3452,1272 3548,1176 3824,1176 ADCH.1@3900,1100
  Bottom w8: v1(2876,1656) 2876,1568 2908,1536 2908,1516 2920,1504 2920,1400 2976,1344 v1(2976,1308)
AD9: ADCH.2 U1.89 | length 1591.2
  Top w8: v1@2875.31,1524 v1@2879.31,1527.31 ; v1(2876,1524) v1@2879.31,1527.31 ; U1.89@2895.47,1599.8 2896,1592 2896,1545.31 2895.31,1543.31 v1@2879.31,1527.31 ; v1(2936,1324) 2948,1336 2988,1336 3004,1320 3224,1320 3264,1280 3416,1280 3544,1412 3648,1412 3872,1188 3912,1188 ADCH.2@4000,1100
  Bottom w8: v1(2876,1524) 2904,1496 2904,1392 2936,1360 v1(2936,1324)
AD10: ADCH.3 U1.90 | length 1582.1
  Top w8: U1.90@2915.16,1599.8 2915.35,1600 2916,1600 2916,1564 2944,1536 v1(2952,1536) ; v1(3400,1316) 3516,1428 3656,1428 3880,1204 3996,1204 ADCH.3@4100,1100
  Bottom w8: v1(2952,1536) 2952,1416 2992,1376 3076,1376 3080,1372 3356,1372 3400,1328 v1(3400,1316)
AD11(TXD3): ADCH.4 U1.91 | length 1903.4
  Top w8: v1(2908,1684) 2934,1658 2934,1602 U1.91@2934.84,1599.8 ; v1(3280,1308) 3352,1308 3488,1444 3664,1444 3888,1220 4004,1220 4064,1160 4140,1160 ADCH.4@4200,1100
  Bottom w8: v1(2908,1684) 2908,1572 2924,1556 2924,1524 2936,1512 2936,1408 2984,1360 3068,1360 3076,1352 3264,1352 3280,1336 v1(3280,1308)
AD14(RXD3): U1.92 XIO.33 | length 2463.3
  Top w8: v1(2908,1724) 2954.53,1677.53 U1.92@2954.53,1599.8 ; v1(3004,1404) 3040,1368 3340,1368 3464,1492 3688,1492 3912,1268 4044,1268 4104,1208 4380,1208 4572,1400 XIO.33@4700,1400
  Bottom w8: v1(2908,1724) 2954,1678 2954,1610 2980,1584 2980,1426 v1(3004,1404)
AREF: BR1.1 PWMH.8 | length 1732.5
  Top w12: v1(2064,1900) 2100,1864 BR1.1@2108,1859.59
  Bottom w10: PWMH.8@1940,3000 1940,2956 1964,2932 1964,2672 2032,2604 2032,2352 1892,2208 1840,2208 1812,2236 1712,2236 1700,2224 1700,2092 1720,2072 1828,2072 1884,2016 1948,2016 1980,1984 1984,1984 2056,1912 v1(2064,1900)
AVREF: C19.2 L3.2 U1.75 | length 454.3
  Top w8: C19.2@2608,1501.5 2616,1504 C19.2@2619.88,1507.88
  Top w11: C19.2@2619.88,1507.88 U1.75@2619.88,1599.8
  Top w12: L3.2@2295.31,1476 2324,1476 2380,1532 2492,1532 2522.5,1501.5 C19.2@2608,1501.5
AVREFL: BR1.2 C34.2 JR1.2 L3.1 | length 486.3
  Top w12: JR1.2@2108,1801.5 BR1.2@2108,1808.41 2118.09,1808.41 C34.2@2150.5,1776 2150.5,1730.5 v1(2152,1736) ; v1(2136,1480) 2140,1476 L3.1@2208.69,1476
  Bottom w12: v1(2136,1480) 2136,1512 2192,1568 2192,1656 2148,1700 2148,1720 v1(2152,1736)
BD+: J3.P3 R20.2 Z4.2 | length 471.1
  Top w10: J3.P3@1161,1875 1162,1876 1212,1876 1232,1856 Z4.2@1232,1855.37 1236,1867.37 1272,1868 1396,1992 1496,1992 1508,1980 1546.5,1980 R20.2@1554.5,1988
BD-: J3.P2 R19.2 Z3.2 | length 494.6
  Top w10: J3.P2@1161,1901 1228.37,1901 Z3.2@1260,1932.63 1256.63,1944.63 1257.26,1944 1284,1944 1360,2020 1408,2020 v1(1416,2028) ; v1(1480,1960) 1516,1960 1532,1944 R19.2@1554.5,1944
  Bottom w10: v1(1416,2028) 1480,1964 v1(1480,1960)
BOOST: C42.1 D3.C IC2.1 | length 165.1
  Top w16: D3.C@4108,1609.07 4129.07,1621.07 4140,1632 C42.1@4197,1632 4186.72,1625.72 IC2.1@4186.72,1569.4
CANRX0: ADCH.7 U1.24 | length 2988.2
  Top w8: v1(2800,2384) 2816,2400 2816,2448 U1.24@2816.73,2450.2 ; v1(2860,2212) 2888,2240 2976,2240 2988,2252 3072,2252 3088,2268 v1(3144,2268) ; v1(3340,1576) 3368,1576 3480,1688 3512,1688 3540,1660 3732,1664 3984,1412 4340,1412 v1(4364,1436)
  Bottom w8: v1(2800,2384) 2800,2360 2824,2336 2824,2268 2860,2232 v1(2860,2212) ; v1(3144,2268) 3144,2196 3124,2176 3124,1888 3252,1760 3252,1720 3304,1668 3304,1612 v1(3340,1576) ; v1(4364,1436) 4420,1436 4500,1356 ADCH.7@4500,1100
CANTX0: ADCH.8 U1.23 | length 3010.6
  Top w8: U1.23@2836.42,2450.2 2836,2450.2 2836,2392 v1(2844,2384) ; v1(2904,2212) 2972,2212 2996,2236 3080,2236 3096,2252 3120,2252 3132,2240 3172,2240 v1(3184,2252) ; v1(3340,1616) 3364,1640 3404,1640 3472,1708 3516,1708 3544,1680 3740,1680 3992,1428 4312,1428 4356,1472 v1(4396,1472)
  Bottom w8: v1(2844,2384) 2844,2272 v1(2904,2212) ; v1(3184,2252) 3184,2212 3140,2168 3140,1896 3268,1768 3268,1728 3320,1676 3320,1632 v1(3340,1616) ; v1(4396,1472) 4420,1472 4520,1372 4520,1180 ADCH.8@4600,1100
CANTX1/IO: U1.140 XIO.34 | length 3132.6
  Top w8: U1.140@3350.2,2290.75 3382.75,2290.75 3404,2312 v1(3404,2320) ; v1(3428,2668) 3448,2668 3500,2616 3584,2616 3592,2608 3976,2608 4000,2632 4144,2632 4160,2648 4240,2648 4260,2668 4304,2668 4340,2632 v1(4420,2632) ; v1(4592,1352) 4752,1352 XIO.34@4800,1400
  Bottom w8: v1(3404,2320) 3408,2320 3432,2344 3432,2376 3420,2388 3400,2388 3388,2400 3388,2436 3448,2496 3448,2584 3428,2604 v1(3428,2668) ; v1(4420,2632) 4420,2408 4516,2312 4516,1808 4552,1776 4592,1736 v1(4592,1352)
CMP: C31.2 IC1.5 Q2.3 RN4.3 RN4.4 | length 565
  Top w8: IC1.5@1672,2138 IC1.5@1678.85,2138.35 ; Q2.3@1952,2048 Q2.3@1956.69,2054
  Top w12: IC1.5@1672,2138 1722,2138 v1(1732,2148) 1713.41,2166.59 C31.2@1713.5,2201 ; RN4.3@1945.43,2184.25 RN4.4@1945.43,2152.76 1945.43,2152.57 1946,2048 Q2.3@1974,2048
  Top w16: v1(1904,2048) 1946,2048 Q2.3@1952,2048
  Bottom w12: v1(1732,2148) 1784,2096 1837,2096 1885,2048 v1(1904,2048)
D+: R6.1 U1.37 USB1.3 Z1.1 | length 1086.3
  Top w10: Z1.1@1312,2472 1335.64,2472 ; 1361.64,2432 1362,2432 ; 1410,2430 1410,2440 ; 1522.43,2417.35 1622.66,2317.45 ; 1638.46,2310 1805.64,2310 ; 1817.32,2311.32 1825.68,2311.68 ; 1829.36,2313 2058.64,2313 ; 2080.32,2324.32 2132.68,2376.68 ; 2144.36,2382 2179.04,2382 ; 2199.18,2392 2216,2392 ; 2236,2380 2252,2380 ; 2284,2396 R6.1@2363.59,2396 ; R6.1@2354,2396 2355.5,2396 R6.1@2356,2395.5 R6.1@2363.59,2396 ; R6.1@2369.64,2396 R6.1@2363.59,2396 ; 2386.32,2388.68 2389.68,2383.32 ; 2393.36,2376 2399.1,2375 ; 2405.89,2375.16 2412,2376 ; 2417.44,2375 2458,2375 2467.66,2370.34 2468,2370 ; 2468.48,2370 2494,2370 U1.37@2499.8,2369.49
  Top w12: USB1.3@1172,2500 USB1.3@1161.3,2500 1216,2500 1284,2472 1312,2472 Z1.1@1312,2471.37
D-: R5.1 U1.38 USB1.2 Z2.1 | length 1112.2
  Top w10: USB1.2@1161.3,2525.59 USB1.2@1175.01,2525.59 ; Z2.1@1304,2536 Z2.1@1312,2536.63 ; Z2.1@1312,2536 Z2.1@1330.5,2536 ; 1346.35,2520.51 1353.35,2509.17 ; 1549.79,2430.21 1621.36,2358.64 ; 1658.71,2338 1789.49,2338 ; 1807.36,2341 2038.29,2341 ; 2063.64,2349.64 2123.86,2409.86 ; 2141.21,2416.5 2165.48,2416.5 ; 2180.75,2421.71 2184.75,2424.79 ; 2200.02,2429 2382.17,2429 ; 2423.18,2410.5 R5.1@2454.5,2410.5 ; U1.38@2499.8,2349.8 2530.82,2349.8 ; 2505.86,2410 2456,2410 R5.1@2456,2410.5 ; 2528.93,2401.07 2538.34,2391.66 ; 2537.66,2351.46 2546.34,2362.14 ; 2548,2368.98 2548,2372.82 ; R5.1@2454.5,2410.5 R5.1@2456,2410.5 ; R5.1@2454.5,2410.5 2456,2408 R5.1@2456,2410.5
  Top w12: USB1.2@1166,2526 1176,2526 1238,2526 1284,2536 1312,2536 Z2.1@1312,2536.63 Z2.1@1311.37,2536
DAC0(CANRX1): ADCH.5 U1.76 | length 2093.1
  Top w8: U1.76@2639.57,1599.8 2640,1592 2640,1520 2680,1480 2756,1480 2792,1444 v1(2812,1444) ; v1(2848,1324) 2884,1324 2912,1352 3000,1352 3016,1336 3356,1336 3480,1460 3672,1460 3896,1236 4016,1236 4076,1176 4152,1176 4160,1168 4232,1168 ADCH.5@4300,1100 ADCH.5@4296,1104
  Bottom w8: v1(2812,1444) 2840,1416 2840,1340 v1(2848,1324)
DAC1: ADCH.6 U1.77 | length 2196.9
  Top w8: U1.77@2659.25,1599.8 2659.25,1524.75 2688,1496 2788,1496 v1(2800,1484) ; v1(2812,1348) 2816,1348 2828,1360 2892,1360 2900,1368 3012,1368 3028,1352 3348,1352 3472,1476 3680,1476 3904,1252 4032,1252 4092,1192 4308,1192 ADCH.6@4400,1100
  Bottom w8: v1(2800,1484) 2784,1468 2784,1376 v1(2812,1348)
DTR: IC6.13 R18.1 | length 237.8
  Top w10: R18.1@1642.11,1468.56 1641.78,1472.49 1661.42,1492.13 1661.42,1566.93 1692.91,1598.43 1692.91,1606.3 1725.84,1639.23 IC6.13@1725.84,1671.54
EEXTINT: U1.25
EMDC: U1.123
EMDIO: U1.127
EN: IC2.4 R10.2 | length 133.3
  Top w16: IC2.4@4277.28,1494.6 4278.68,1496 4320,1496 4341.59,1517.59 4352,1517.59 R10.2@4390.5,1548
ERASE_CMD: IC6.23 R99.1 T3.3 | length 630.6
  Top w8: v1(2112,1620) 2120,1628 T3.3@2120,1651
  Top w10: IC6.23@1812.46,1817.21 1861.21,1817.21 1876,1832 1916,1832 1928,1844 1928,1880 v1(1932,1884)
  Top w12: R99.1@2116,1682.5 2116,1655 T3.3@2120,1651
  Bottom w10: v1(1932,1884) 1932,1744 1972,1704 1972,1664 2008,1628 2104,1628 v1(2112,1620)
ERASE_S: ERASE.2 T3.1 U1.130 | length 2389.3
  Top w8: T3.1@2200,1613 2219,1648 2288,1648 2296,1640 2324,1640 2352,1668 2408,1668 2420,1656 2568,1656 2616,1704 2668,1704 v1(2676,1712) ; v1(2796,2092) 2824,2064 2872,2064 2888,2080 3140,2080 3148,2072 3280,2072 3301.9,2093.9 U1.130@3350.2,2093.9 3381.9,2093.9 3396,2108 3396,2228 3388,2236 3388,2272 3404,2288 3416,2288 3432,2304 3432,2368 3468,2404 3468,2452 3544,2528 3660,2528 3676,2544 3756,2544 ERASE.2@3776,2524
  Bottom w8: v1(2676,1712) 2680,1712 2688,1704 2716,1704 2736,1724 2736,1740 2788,1792 2788,1888 2780,1896 2780,2076 v1(2796,2092)
ERX_DV: U1.119
ERX_ER: U1.122
ERXD0: U1.120
ERXD1: U1.121
ETX_CLK: U1.113
ETX_EN: U1.114
ETXD0: U1.115
ETXD1: U1.118
FB: IC2.3 R11.1 R12.2 | length 126.7
  Top w24: R12.2@4071,1468 4127,1468 R11.1@4128,1469 4161.13,1469 IC2.3@4186.72,1494.6
GATE_CMD: IC1.7 T1.3 | length 188.1
  Top w8: IC1.7@1672,2087 IC1.7@1678.85,2087.17
  Top w10: T1.3@1527,2039 1528,2040 1528,2068 1536,2076 1636,2076 1647,2087 IC1.7@1672,2087
GND: C1.- C2.- C3.- C4.1 C5.1 C6.1 C7.1 C8.1 C9.1 C10.1 C11.- C12.1 C13.1 C14.1 C15.1 C16.1 C17.1 C18.1 C19.1 C21.2 C22.2 C23.2 C24.2 C25.2 C26.2 C27.- C28.2 C29.- C30.1 C31.1 C32.1 C33.- C34.1 C35.- C36.2 C37.2 C38.2 C39.2 C40.2 C41.- D4.P$2 DEBUG.1 IC1.4 IC2.2 IC4.1 IC6.3 IC6.28 IC6.33 IC10.3 ICSP1.6 J3.P5 J3.P$1 J3.P$2 J3.P$3 J3.P$4 J3.P$5 J3.P$6 J3.P$7 J3.P$8 J3.S1 J3.S2 J3.S3 J3.S4 J3.S5 J3.S6 JTAG.3 JTAG.5 JTAG.9 L.C ON.C PC1.- PC2.- POWER.6 POWER.7 PWMH.7 Q2.2 R2.1 R7.1 R8.1 R11.2 R18.2 RESET.1 RESET.2 RN1.1 RN1.2 RN1.7 RN1.8 RN2.1 RN2.4 RN2.5 RN2.8 RN4.1 RN4.2 RN4.5 RN4.7 SPI.6 T2.3 U1.12 U1.33 U1.44 U1.46 U1.54 U1.58 U1.74 U1.106 U1.126 USB1.5 USB1.P$1 USB1.P$2 USB1.P$3 USB1.P$4 USB1.P$5 USB1.P$6 USB1.P$7 USB1.P$8 USB1.P$9 USB1.P$10 USB1.P$11 USB1.S1 USB1.S2 USB1.S3 USB1.S4 X2.1 X2.3 XIO.35 XIO.36 Y1.2 Y1.4 Y4.2 Y4.4 Z1.2 Z2.2 Z3.1 Z4.1 Z5.1 | length 5206.6
  Top w8: RESET.2@1408,3032 RESET.2@1410.35,3008.58 ; R2.1@1789.5,2688 1789.5,2677.5 1772,2660 1772,2572 1772.25,2572.25 RN1.2@1798.57,2572.25 ; U1.33@2639.57,2450.2 U1.33@2640,2456 ; v1@3248,1668 v1(3256,1668) ; U1.126@3350.2,2015.16 3351.84,2015.16 U1.126@3352,2015
  Top w10: USB1.S2@1173.11,2405.51 1178.8,2407.98 1178.89,2408.02 1180,2408.5 USB1.P$10@1180,2408 ; C36.2@1544,1773.5 1559.94,1797.53 IC6.3@1619.54,1797.53 1690.47,1797.53 1696,1792 1696,1788 IC6.33@1716,1768 ; IC6.33@1725.84,1768 IC6.28@1725.84,1864.46 ; U1.46@2499.8,2192.32 2532.32,2192.32 2540,2200 2540,2231.69 ; U1.106@3230.12,1597.88 3230.12,1574.12 ; 3236,1544 3230.12,1549.88 3230.12,1574.12 ; v1(3256,1668) 3230,1642 3230,1574 3230.12,1574.12 ; 3574.41,3009.59 3580,3004 3596,3004 3600,3000 3600,2944 3582.5,2926.5
  Top w11: 2448,2232 2448.31,2231.69 U1.44@2499.8,2231.69 2540,2231.69 2559.69,2231.69 2560,2232 ; 2456,2032 2458.84,2034.84 U1.54@2499.8,2034.84 2530.84,2034.84 2540,2044 ; U1.58@2499.8,1956.1 2551.9,1956.1 2560,1948 2618,1948 ; U1.74@2600.2,1595.8 U1.74@2600.2,1599.8 ; 2639.5,2376 2639.5,2524 ; U1.33@2639.57,2450.2 2639.57,2504.07 2639.5,2524 ; 2644,2532 2639.5,2524 ; 3048,2412 3052.95,2416.95 U1.12@3052.95,2450.2 3052.95,2523.05 3048,2528 ; U1.106@3230.12,1597.88 U1.106@3230.12,1599.8 ; U1.126@3344,2015 3352,2015 3382,2015 3392,2025 3392,2032 3393.5,2033.5
  Top w12: C28.2@1068,2257.5 USB1.P$5@1068,2329.56 ; C30.1@1715,1967.5 1725.84,1952.57 IC6.28@1725.84,1864.46 ; C31.1@1748.5,2201 1791,2201 v1(1796,2200) ; C38.2@1772,2001.5 1801.59,2001.59 v1(1812,2000) ; IC1.4@1845.19,2138.35 1841.19,2157.19 v1(1856,2172) 1899.75,2215.75 RN4.2@1945.43,2215.75 ; RN4.1@1945.43,2247.24 1919.24,2247.24 1912,2240 1912,2220 1916,2216 1945.17,2216 RN4.2@1945.43,2215.75 ; RN4.5@1998.57,2152.76 1996.76,2152.76 1996,2152 1996,2112 v1(1988,2104) 2034.71,2104 Q2.2@2043.31,2091.4 ; C23.2@2126.5,2096 2118.41,2122.41 v1(2140,2144) ; C24.2@2126.5,2200 2118.41,2221.59 v1(2100,2240) 2068,2208 2024,2208 2016.25,2215.75 RN4.7@1998.57,2215.75 RN4.2@1945.43,2215.75 ; DEBUG.1@2310,2712 2316,2718 2316,2660 2326.41,2649.59 C22.2@2376,2625.5 ; C15.1@2346.5,2000 2346.5,2010.5 2368,2032 2400,2032 ; C15.1@2348,2000 2346.5,1998.5 2346.5,1985.5 2376,1956 v1(2376,1952) ; Y1.2@2438.58,2554.72 2438.58,2572.44 Y1.4@2511.42,2645.28 ; v1(2512,1560) 2528,1544 2584,1544 2600.2,1560.2 U1.74@2600.2,1595.8 ; 2618,1948 2638,1928 v1(2653,1924)
  Top w14: 1160,2032 1161,2031 J3.P$1@1161,1978 J3.S3@1161,1973
  Top w16: J3.S1@1055,2005 J3.S5@1055,1915 J3.S6@1055,1835 J3.S2@1055,1745 1093,1745 1124,1776 1160,1776 J3.S4@1161,1777 ; J3.P5@1161,1823 J3.P$7@1161,1782 J3.S4@1161,1777 ; USB1.P$8@1176,2612 1180,2612 1192,2612 v1@1192,2672 ; USB1.P$10@1179,2420 USB1.5@1179,2448 ; v2(1240,1716) 1240,1764 Z4.1@1232,1776.63 1231.63,1777 J3.S4@1161,1777 ; RN2.5@1726.57,2383.76 1728,2383.76 RN2.5@1728,2384 ; C10.1@2440,1570.5 2501.5,1570.5 v1(2512,1560) ; R11.2@4128,1539 4135,1532 IC2.2@4186.72,1532 4216,1532 4232,1516 v2(4232,1464)
  Top w20: v1(1308,2024) 1353.66,2077.66 ON.C@1373.66,2090 L.C@1373.66,2164 ; C1.-@2491.06,1376 C1.-@2504,1388.94
  Top w24: USB1.P$8@1176,2612 1176,2640 1180,2640
  Top w32: 1124,2591 1180,2591 1180,2591.61 1180,2612 1180,2640 ; USB1.P$10@1168,2409 1124,2409 1167.21,2408.23 1173.16,2408.12 1178.89,2408.02 1179.03,2408.02 1180,2408 1180,2356 ; USB1.P$10@1180,2408.5 USB1.P$10@1180,2412 ; v1(1468,2844) 1468.94,2843.06 C35.-@1536.94,2843.06 ; C27.-@1668,2835.06 1696,2836 v1(1740,2880) ; C29.-@3872,2388 3867.06,2391.06 C29.-@3856,2379.06 C29.-@3876,2368 ; v2(3940,2340) v2(3986,2340) 4080,2340 4080,2344 4080.82,2347.29 4081,2348 IC4.1@4082,2347 ; v2(4328,1672) 4328.96,1668.96 D4.P$2@4328.96,1724 4333.91,1727.06 C41.-@4412,1731.06 v2(4412,1800)
  Top w40: USB1.P$8@1180,2591 1180,2588 USB1.P$8@1184,2588 ; C35.-@1536.94,2843.06 C35.-@1540,2835.06 C27.-@1668,2835.06
  other v1: 3350,1060 3804,1096 4450,1140 2150,1142 1088,1192 1240,1192 1444,1192 3736,1264 1832,1312 2008,1312 1348,1424 1088,1432 2504,1448 4904,1457 3272,1528 1588,1552 1280,1632 1664,1716 3560,1736 3664,1736 4904,1755 1308,1780 1768,1820 4652,1848 2220,1860 2889,1928 3476,1940 2164,1948 2240,2044 3796,2052 4904,2060 3456,2064 2600,2256 1872,2260 2216,2260 2312,2288 2968,2340 3256,2340 4904,2356 2092,2440 3990,2476 3720,2516 1480,2524 3488,2552 4306,2620 1324,2656 1196,2672 1308,2748 2488,2772 4452,2908 3450,2952 2716,3000 3604,3000 1890,3036 4050,3052
  other v2: 4108,1676 3808,1696 3776,1728 3808,1760 4364,1800 4456,1800 4186,1956 1180,2324 1245.94,3014
JTAG_RESET: JTAG.10 R1.1 RN1.4 | length 176.4
  Top w8: RN1.4@1798.57,2635.24 1832.76,2635.24 1852,2616 JTAG.10@1887,2616 ; R1.1@1904,2686.5 1888,2672 JTAG.10@1888,2617 ; JTAG.10@1887,2616 1888,2616 JTAG.10@1888,2617 ; JTAG.10@1887,2616 JTAG.10@1888,2617
JTAG_TCK: DEBUG.2 JTAG.4 RN2.7 U1.28 | length 2097.7
  Top w8: RN2.7@1726.57,2446.75 1732,2446 1780,2446 v1(1800,2466) ; v1(1800,2788) 1840,2788 1872,2820 2200,2820 v1(2208,2828) 2464,2828 2472,2820 2660,2820 2668,2812 2744,2812 v1(2748,2816) ; v1(2728,2384) 2737.99,2393.99 U1.28@2737.99,2450.2
  Bottom w8: v1(1800,2788) 1800,2768 1792,2760 1792,2524 1800,2516 v1(1800,2466) JTAG.4@1887,2466 ; v1(2728,2384) 2736,2392 2736,2524 2748,2536 v1(2748,2816)
  Bottom w10: v1(2208,2828) 2208,2714 DEBUG.2@2210,2712
JTAG_TDI: JTAG.8 RN1.3 U1.29 | length 1848
  Top w8: v1(1868,2896) 1880,2896 1892,2884 2056,2884 2084,2912 2132,2912 2140,2904 2488,2904 2508,2924 2700,2924 v1(2704,2920) ; U1.29@2718.31,2450.2 2718,2483 2720,2485 v1(2720,2548)
  Top w10: RN1.3@1798.57,2603.75 1820.25,2603.75 1856,2568 1885,2568 JTAG.8@1887,2566
  Bottom w8: v1(1868,2896) 1868,2780 1848,2760 1848,2744 1832,2728 1832,2584 1848,2568 1888,2568 1887,2567 JTAG.8@1887,2566 ; v1(2704,2920) 2720,2900 2720,2824 2708,2812 2708,2560 v1(2720,2548)
JTAG_TDO: JTAG.6 U1.30 | length 1844.5
  Top w8: v1(1828,2824) 1848,2824 1860,2836 2128,2836 2148,2856 2464,2856 2484,2836 2688,2836 v1(2692,2840) ; U1.30@2698.62,2450.2 2698,2448.82 2698,2440 2700,2440 v1(2700,2352)
  Bottom w8: v1(1828,2824) 1828,2760 1812,2744 1812,2557 1853,2516 JTAG.6@1887,2516 ; v1(2692,2840) 2692,2534 2700,2526 v1(2700,2352)
JTAG_TMS: DEBUG.3 JTAG.2 RN2.6 U1.31 | length 2071.8
  Top w8: RN2.6@1726.57,2415.25 1732,2414 v1(1768,2414) ; v1(1768,2820) 1772,2820 1804,2852 2080,2852 2096,2868 v1(2108,2868) 2112,2872 2476,2872 2496,2852 2640,2852 v1(2652,2864) ; v1(2672,2512) 2679,2505 2679,2457 U1.31@2678.94,2450.2
  Bottom w8: v1(1768,2820) v1(1768,2414) 1886,2414 JTAG.2@1887,2416 ; v1(2108,2868) 2108,2714 DEBUG.3@2110,2712 ; v1(2652,2864) 2652,2532 v1(2672,2512) ; JTAG.2@1887,2416 1888,2416 1888,2415 JTAG.2@1887,2416
L13: IC1.1 IC1.2 RN3.6 | length 521.5
  Top w8: RN3.6@1573.57,2202.25 1582.25,2202.25 1588,2200 1632,2200 1664,2232 1804,2232 1824,2212 1824,2180 1800,2156 1800,2094.33 1807.17,2087.17 ; IC1.1@1840,2062 IC1.1@1845.19,2061.57
  Top w12: IC1.1@1840,2062 1800,2062 1800,2080 1807.17,2087.17 IC1.2@1845.19,2087.17
MASTER-RESET: C20.1 DEBUG.4 POWER.3 R1.2 R23.2 RESET.3 RESET.4 SPI.5 U1.47 | length 7410.1
  Top w8: 1360,2832 RESET.4@1410.35,2831.42 1412,2833.06 1412,2868 1424,2880 1692,2880 1740,2928 1880,2928 1908,2900 2044,2900 2072,2928 2140,2928 2148,2920 2196,2920 2208,2932 v1(2216,2932) ; R1.2@1904,2721.5 DEBUG.4@2000.41,2721.59 ; R23.2@1921.5,1792 1921.5,1766.5 1940,1748 v1(2002,1748) ; v1(2212,1696) 2264,1732 2320,1732 2324,1728 v1(2340,1728) ; v1(2348,1228) 2356,1236 2766,1236 2774,1228 2828,1228 2896,1296 2924,1296 2944,1276 2996,1276 3008,1288 3208,1288 3248,1248 3324,1248 3332,1240 v1(3444,1240) ; U1.47@2499.8,2172.64 2544.64,2172.64 2576,2204 v1(2588,2204) ; SPI.5@3504,2000 SPI.5@3505,2000
  Top w10: DEBUG.4@2000.41,2721.59 DEBUG.4@2010,2712 2010,2698 2052,2656 2200,2656 v1(2224,2632)
  Top w12: RESET.3@1079.65,2831.42 RESET.3@1100,2831.42 ; C20.1@1105.5,2772 1105.5,2825.92 RESET.3@1100,2831.42 ; RESET.4@1410.35,2831.42 1410.35,2836 1396,2836 RESET.4@1396,2832 ; RESET.4@1412,2832 RESET.4@1396,2832 ; RESET.3@1100,2831.42 1156,2831.42 1156,2832 1360,2832 RESET.4@1396,2832
  Bottom w8: v1(2002,1748) 2034,1780 2148,1780 2180,1748 2180,1708 2196,1692 2200,1692 v1(2212,1696) ; v1(2216,2932) 2216,2904 2248,2872 2456,2872 2520,2808 2520,2760 2560,2720 2560,2512 2596,2476 2596,2344 2640,2300 2640,2236 2608,2204 v1(2588,2204) ; v1(2224,2632) 2152,2560 2152,2280 2192,2240 2192,2044 2204,2032 2212,2032 2232,2012 2232,2000 2288,1944 2288,1816 2340,1764 v1(2340,1728) 2340,1236 v1(2348,1228) 2300,1180 POWER.3@2300,1100 ; v1(3444,1240) 3444,1248 3428,1264 3428,1380 3612,1564 3612,1884 3534,1962 3534,1970 3504,2000 SPI.5@3505,2000
  Bottom w10: v1(2224,2632) 2260,2668 2260,2756 2248,2768 2248,2872
MISO: SPI.1 U1.108 | length 1215.6
  Top w8: U1.108@3269.49,1599.8 3272,1636 3296,1660 3400,1660 3468,1728 3520,1728 3548,1700 3712,1700 v1(3720,1708)
  Bottom w8: SPI.1@3504,2200 SPI.1@3505,2200 3520,2200 3568,2152 3672,2152 3724,2100 3724,2072 3736,2060 3736,2020 3752,2004 3752,1872 3720,1840 v1(3720,1708)
MISO2: IC6.17 ICSP1.1 | length 425
  Top w8: IC6.17@1812.46,1699.1 1812.46,1667.54 v1(1816,1664)
  Bottom w8: v1(1816,1664) 1796,1664 1776,1644 1776,1604 1788,1592 1840,1592 1900,1532 1970,1532 ICSP1.1@2025.94,1480